# Allegro board LAY-96099_B.brd
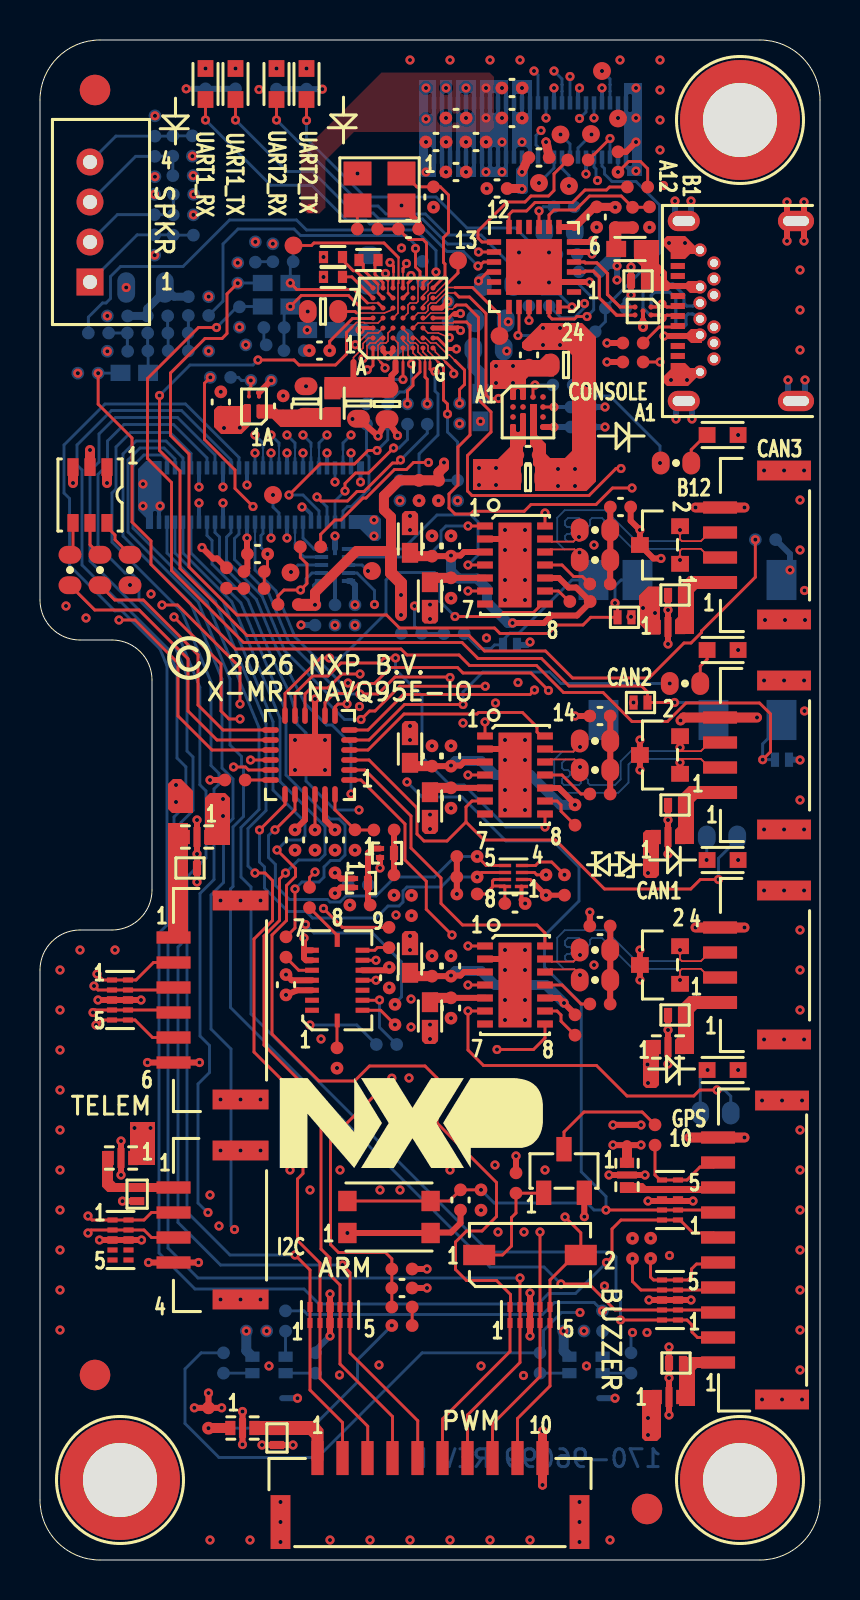
[diagram p0: board, top side]
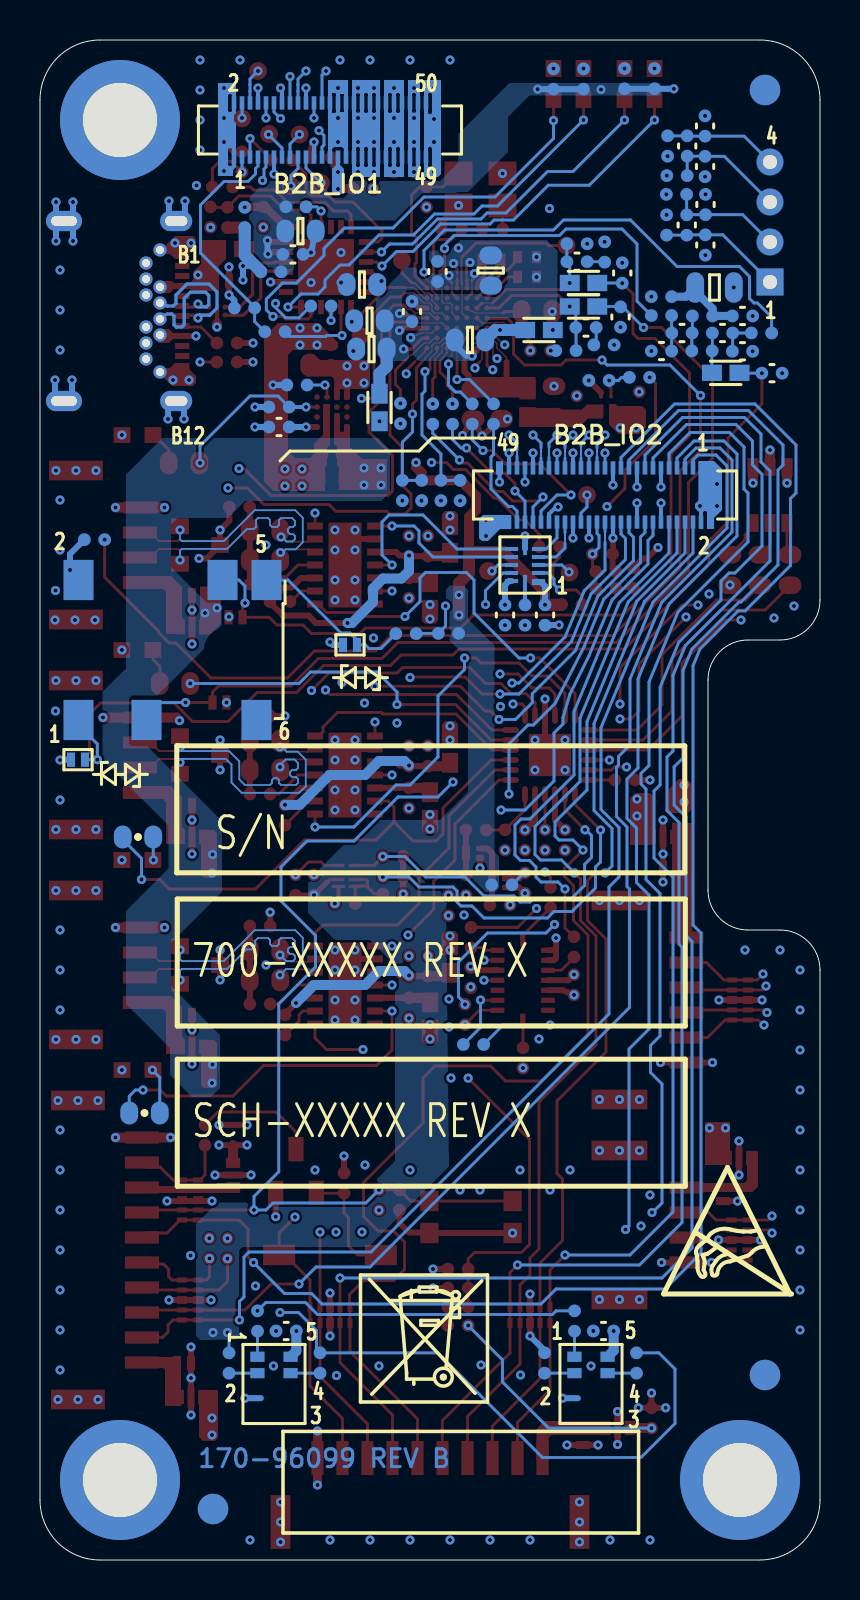
[diagram p1: board, bottom side, seen from below]

Outline 39 x 76 mm; copper layers: TOP, L2_GND1, L3_SIG1, L4_SIG2, L5_GND2, BOTTOM. Coordinates in mm from the lower left corner of the outline.
Outline path: 0,73 arc(0.88,75.12) 3,76 36,76 arc(38.12,75.12) 39,73 39,3 arc(38.12,0.88) 36,0 3,0 arc(0.88,0.88) 0,3 0,29.5 arc(0.59,30.91) 2,31.5 3.6,31.5 arc(5.01,32.09) 5.6,33.5 5.6,44 arc(5.01,45.41) 3.6,46 2,46 arc(0.59,46.59) 0,48 0,73

## Design rules (mm)
constraint set DEFAULT: min track width 0.145
net group CAN1_: nets CAN1_H CAN1_L
net group CAN2_: nets CAN2_H CAN2_L
net group CAN3_: nets CAN3_H CAN3_L
net group USB_CON_D: nets USB_CON_DM USB_CON_DP
net group USB_D: nets USB_DM USB_DP
net group CLK: nets CCM_CLKO2_FLEXIO1_IO27 CCM_CLKO3_CAN3_TX CCM_CLKO4_CAN3_RX DEBUG_TCLK_SWCLK GPIO15_SPI8_SCK SAI2_TX_BCLK
net group I2C: nets I2C4_SCL I2C4_SDA I3C1_SCL I3C1_SDA I3C2A_SCL I3C2A_SDA
net group POWER: nets CON_CAN1_5V0 CON_CAN2_5V0 CON_CAN3_5V0 N20053822 N20058873 N20059703 N20163544 N20163589 N20386625 VBUS VDD_CAN1_3V3 VDD_CAN1_5V0 VDD_CAN2_3V3 VDD_CAN2_5V0 VDD_CAN3_3V3 VDD_CAN3_5V0 VDD_CON_GPS_3V3 VDD_CON_GPS_5V0 VDD_CON_I2C_5V0 VDD_CON_PWM VDD_CON_UART_5V0

## Placement (name value [footprint] x y rotation side)
BH1  MH3.7_6  [MH236-146P]  35 72 0 top
BH2  MH3.7_6  [MH236-146P]  35 4 0 top
BH3  MH3.7_6  [MH236-146P]  4 4 0 top
C1  0.047uF  [CC0402_25]  19.6 29.7 90 top
C2  0.047uF  [CC0402_25]  20.55 27.6 270 top
C4  1uF  [CC0402_25]  20.55 29.7 90 top
C5  4700pF  [CC0402_25]  28 31.7 180 top
C6  0.047uF  [CC0402_25]  19.6 40.2 90 top
C7  0.047uF  [CC0402_25]  20.55 38.1 270 top
C9  1uF  [CC0402_25]  20.55 40.2 90 top
C10  4700pF  [CC0402_25]  28 42.2 180 top
C11  0.047uF  [CC0402_25]  19.6 50.7 90 top
C12  0.047uF  [CC0402_25]  20.55 48.6 270 top
C14  1uF  [CC0402_25]  20.55 50.7 90 top
C15  4700pF  [CC0402_25]  29.02 52.65 0 top
C16  0.1uF  [CC0402_25]  24.45 60.25 90 top
C17  1000pF  [CC0402_25]  27.05 56.65 0 bottom
C18  0.1uF  [CC0402_25]  17.46 29.11 270 top
C19  0.1uF  [CC0402_25]  12.3 28.76 90 top
C132  4.7uF  [CC0603_OV]  22.52 61.96 0 bottom
C133  4.7uF  [CC0603_OV]  16.46 64.47 90 bottom
C134  0.1uF  [CC0402_25]  20.4 62.42 90 bottom
C135  4.7uF  [CC0603_OV]  22.43 60.55 0 bottom
C136  4.7uF  [CC0603_OV]  17.5 61 0 bottom
C138  4.7uF  [CC0603_OV]  17.35 57.8 270 top
C139  0.1uF  [CC0402_25]  12.15 64.91 180 bottom
C140  220pF  [CC0402_25]  9.89 64.35 90 bottom
C141  4.7uF  [CC0603_OV]  15.92 57.83 270 top
C142  0.1uF  [CC0402_25]  11.7 61.62 180 bottom
C143  220pF  [CC0402_25]  9.97 62.15 270 bottom
C144  1uF  [CC0402_25]  6.9 61.35 180 bottom
C145  1uF  [CC0402_25]  4.88 61.35 0 bottom
C146  2.2uF  [CC0402_TOL0P2]  16.43 65 0 top
C147  2.2uF  [CC0402_TOL0P2]  14.65 65.15 180 top
C148  2.2uF  [CC0402_TOL0P2]  14.65 64.16 180 top
C149  4.7uF  [CC0603_OV]  14.15 62.42 180 top
C150  1uF  [CC0402_25]  13.97 60.47 180 top
C151  15pF  [CC0402_25]  5.73 65.75 270 bottom
C152  1uF  [CC0402_25]  9.04 57.9 90 top
C153  0.1uF  [CC0402_25]  12.16 57.7 90 top
C154  4.7uF  [CC0603_OV]  13.3 57.92 90 top
C155  15pF  [CC0402_25]  6.66 66.75 90 bottom
C156  15pF  [CC0402_25]  5.72 67.78 270 bottom
C157  15pF  [CC0402_25]  5.75 69.67 270 bottom
C158  15pF  [CC0402_25]  6.64 70.7 90 bottom
C159  15pF  [CC0402_25]  5.75 71.7 270 bottom
C500  0.1uF  [CC0402_25]  19.12 64.42 90 bottom
C514  0.1uF  [CC0402_25]  12.75 36 270 top
C515  0.1uF  [CC0402_25]  14.75 36 270 top
C523  10uF  [CC0603_OV]  24.4 54.1 0 top
C524  0.1uF  [CC0402_25]  24.4 55.25 0 top
C526  10uF  [CC0603_OV]  26.3 59.75 0 top
C527  0.1uF  [CC0402_25]  19.8 70.9 180 top
C528  0.1uF  [CC0402_25]  23.6 72.1 0 top
C531  1uF  [CC0402_25]  20.8 69.4 0 top
C532  1uF  [CC0402_25]  21.8 70.9 180 top
C533  0.1uF  [CC0402_25]  20.8 72.1 0 top
C534  0.1uF  [CC0402_25]  23.6 73.6 0 top
C535  0.1uF  [CC0402_25]  15.75 47.25 270 bottom
C536  0.1uF  [CC0402_25]  13.75 47.25 270 bottom
C537  0.1uF  [CC0402_25]  18.1 13.6 0 top
C538  0.1uF  [CC0402_25]  10.88 50.3 180 top
C544  0.1uF  [CC0402_25]  26.35 65.28 180 bottom
C545  4.7uF  [CC0603_OV]  22.9 63.77 0 bottom
C546  4.7uF  [CC0603_OV]  25.98 66.44 180 bottom
C547  1uF  [CC0402_25]  27.83 67.15 270 top
C588  15pF  [CC0402_25]  7.92 60.45 0 bottom
C589  15pF  [CC0402_25]  3.88 60.44 0 bottom
C590  15pF  [CC0402_25]  2.4 59.34 180 bottom
C591  1uF  [CC0402_25]  3.88 62.2 180 bottom
C592  22uF  [CC0805_OV]  5.28 63.62 180 bottom
C593  10pF  [CC0402_25]  19.68 68.15 270 top
C594  10pF  [CC0402_25]  18.43 66.55 0 top
C595  0.1uF  [CC0402_25]  23.75 32.83 0 top
C597  0.1uF  [CC0402_25]  10.82 11.45 0 bottom
C598  0.1uF  [CC0402_25]  26.69 11.45 0 bottom
C599  1uF  [CC0402_25]  24.95 70.12 0 top
C600  0.1uF  [CC0402_25]  22.85 68.58 180 top
C601  0.1uF  [CC0402_25]  21.02 18 90 top
D1  PESD5V0F1BL  [SOD882]  29.9 63.95 0 top
D2  LED_ORANGE  [LED_0603_11MIL]  8.28 73.8 270 top
D3  LED_GRN  [LED_0603]  9.78 73.8 270 top
D4  LED_ORANGE  [LED_0603_11MIL]  11.82 73.8 270 top
D5  LED_GRN  [LED_0603]  13.32 73.8 270 top
D7  ESD7104  [UDFN10_2P5X1]  31.5 13 180 top
D10  ESD7104  [UDFN10_2P5X1]  4 28 0 top
D26  PESD5V0F1BL  [SOD882]  31.8 9.85 0 top
D27  PESD5V0F1BL  [SOD882]  7.5 34.6 180 top
D31  PESD5V0F1BL  [SOD882]  11.85 6.1 90 top
D32  PESD5V0F1BL  [SOD882]  31.75 48.25 0 top
D33  PESD5V0F1BL  [SOD882]  31.75 37.75 0 top
D34  PESD5V0F1BL  [SOD882]  31.75 27.25 0 top
D35  ESD7104  [UDFN10_2P5X1]  14.5 12.25 90 top
D36  ESD7104  [UDFN10_2P5X1]  24.5 12.25 90 top
D37  ESD7104  [UDFN10_2P5X1]  31.5 18 180 top
D38  ESD7104  [UDFN10_2P5X1]  4.03 16 0 top
D39  LED_SUPER_RED  [LED_0603]  34.13 56.25 0 top
D41  LED_GRN  [LED_0603]  34.13 35 0 top
D42  LED_GRN  [LED_0603]  34.13 45.5 0 top
D43  LED_GRN  [LED_0603]  34.13 24.5 0 top
D44  PESD5V0F1BL  [SOD882]  4.86 18.29 90 top
D45  PESD5V0F1BL  [SOD882]  37.1 40.02 180 bottom
D46  PESD5V0F1BL  [SOD882]  29.23 47.14 180 top
D47  PESD5V0F1BL  [SOD882]  23.5 45.75 180 bottom
D48  PESD5V0F1BL  [SOD882]  30.02 42.87 0 top
FL4  0.1uF  [CC_FIL_0402]  10.12 6.6 0 top
FL5  0.1uF  [CC_FIL_0402]  31.45 8.15 0 top
FL6  0.1uF  [CC_FIL_0402]  29.35 19.25 270 top
FL7  0.1uF  [CC_FIL_0402]  7.85 36.15 180 top
FL8  0.1uF  [CC_FIL_0402]  4.05 20.1 180 top
FL9  0.1uF  [CC_FIL_0402]  31.4 46.65 0 top
FL10  0.1uF  [CC_FIL_0402]  31.4 36.15 0 top
FL11  0.1uF  [CC_FIL_0402]  31.4 25.65 0 top
J1  CON 2X25  [CON_RCPT_2X25_0P4MM_SM]  24.5 71.5 180 bottom
J2  CON 2X25  [CON_RCPT_2X25_0P4MM_SM]  10.75 53.25 0 bottom
J4  CON_1X4  [CON_1X4_1P25_8P25X4P25_SM_RA]  36.25 29.75 90 top
J8  CON_1X4  [CON_1X4_1P25_8P25X4P25_SM_RA]  36.25 40.25 90 top
J9  CON_1X4  [CON_1X4_1P25_8P25X4P25_SM_RA]  36.25 50.75 90 top
J10  23K2 0101#LCP-872-2LF-L22-S22  [CON24_USB_TYPEC_RA_SMT_TH_2P2L]  33 65.5 90 top
J12  CON 1X10 SM  [CON10_1P25_15P75X4P05_SM]  19.5 3.25 0 top
J13  CON_1X4  [CON_1X4_1P25_8P25X4P25_SM]  9 16.75 90 top
J14  CON_1X6  [CON_1X6_1P25_10P75X4P25_SM]  9 28 90 top
J22  CON 1X10 SM  [CON10_1P25_15P75X4P05_SM]  35.75 15.5 90 top
J24  CON 1X4 PLUG  [CON_PH_4M_2MM_TH]  2.5 63.9 90 top
J25  CONN AUDIO 6  [CON6P_JACK_SMT]  34.17 45.5 180 bottom
L1  BLM18KG121TZ1  [IND_0603]  18.5 30.05 270 top
L2  BLM18KG121TZ1  [IND_0603]  19.5 27.2 90 top
L3  BLM18KG121TZ1  [IND_0603]  18.5 40.55 270 top
L4  BLM18KG121TZ1  [IND_0603]  19.5 37.7 90 top
L5  BLM18KG121TZ1  [IND_0603]  18.5 51.05 270 top
L6  BLM18KG121TZ1  [IND_0603]  19.5 48.2 90 top
L7  120OHM@100MHZ  [IND_0603]  14.63 57.84 90 top
L8  120OHM@100MHZ  [IND_0603]  11.82 63.85 180 bottom
L9  120OHM@100MHZ  [IND_0603]  11.82 62.67 180 bottom
L41  120OHM@100MHZ  [IND_0603]  4.72 59.36 180 bottom
L53  120OHM@100MHZ  [IND_0603]  29.5 65.55 180 top
L54  120OHM@100MHZ  [IND_0603]  22.02 57.62 90 bottom
L55  120OHM@100MHZ  [IND_0603]  14.05 61.5 0 bottom
NOREF  -  []  22.2 36.95 0 top
NOREF#2  -  []  10.07 7 0 top
NOREF#3  -  []  24.01 45.44 90 top
NOREF#4  -  []  31.45 9.85 0 top
NOREF#5  -  []  46.6 46.6 90 top
NOREF#6  -  []  6.86 4.9 0 top
NOREF#7  -  []  30.79 46.65 0 top
NOREF#8  -  []  31.4 37.75 0 top
NOREF#9  -  []  17 35.12 90 top
NOREF#10  -  []  10.25 58.37 0 top
NOREF#11  -  []  34 40.88 90 top
NOREF#12  -  []  22.2 26.45 0 top
NOREF#13  -  []  19.7 70.14 0 top
NOREF#14  -  []  19.53 16.35 90 top
NOREF#15  -  []  23.65 56.65 0 top
NOREF#16  -  []  37.2 26.02 90 top
NOREF#17  -  []  14.07 50.55 0 top
NOREF#18  -  []  10.07 7 90 top
NOREF#19  -  []  14.86 26.98 90 top
NOREF#20  -  []  38.1 59.83 90 top
NOREF#21  -  []  36.75 40.02 0 top
NOREF#22  -  []  13.6 30.49 0 top
NOREF#23  -  []  37.8 57.95 90 top
NOREF#24  -  []  29.73 46.83 90 top
NOREF#25  -  []  25.3 47.45 90 top
NOREF#26  -  []  11.45 8.09 90 top
NOREF#27  -  []  21.96 15.25 0 top
NOREF#28  -  []  9.52 6.6 0 top
NOREF#29  -  [unnamed#2]  30.35 2.55 0 top
NOREF#30  -  []  30.13 7.79 0 top
NOREF#31  -  []  5.47 54.6 0 top
NOREF#32  -  []  28.5 70.14 0 top
NOREF#33  -  []  30.15 62.45 90 top
NOREF#34  -  []  23.25 33.67 0 top
NOREF#35  -  []  28.32 48.75 0 top
NOREF#36  -  []  22.25 37.3 0 top
NOREF#37  -  []  34.54 0 90 top
NOREF#38  -  []  8.46 36.51 0 top
NOREF#39  -  []  41.6 57.35 0 top
NOREF#40  -  []  15.43 48.95 90 top
NOREF#41  -  []  38.3 25.6 0 top
NOREF#42  -  []  22.99 45.44 0 top
NOREF#43  -  []  15.53 33.52 0 top
NOREF#44  -  []  9.07 1.35 0 top
NOREF#45  -  []  23.65 56.65 0 top
NOREF#46  -  []  23.15 45.75 0 top
NOREF#47  -  []  46.6 25.6 90 top
NOREF#48  -  []  30.79 46.29 0 top
NOREF#49  -  []  30.84 8.15 0 top
NOREF#50  -  []  33.7 60.05 90 top
NOREF#51  -  []  12.25 42.23 0 top
NOREF#52  -  []  34 52.62 90 top
NOREF#53  -  []  -494.52 -243.34 0 top
NOREF#54  -  []  37.2 36.52 90 top
NOREF#55  -  []  23.29 56.28 0 top
NOREF#56  -  []  25.3 36.95 90 top
NOREF#57  -  []  27.3 8.09 90 top
NOREF#58  -  []  2.5 63.9 90 top
NOREF#59  -  []  11.15 12.6 0 top
NOREF#60  -  []  16.82 35.02 0 top
NOREF#61  -  []  37.86 4.9 0 top
NOREF#62  -  []  34 38.38 0 top
NOREF#63  -  []  2.5 69.9 90 top
NOREF#64  -  []  31.89 59.7 90 top
NOREF#65  -  []  16.02 51.9 90 top
NOREF#66  -  []  30.62 26.54 90 top
NOREF#67  -  []  21.95 22.6 90 top
NOREF#68  -  []  6.68 24.88 0 top
NOREF#69  -  []  0 70.31 0 top
NOREF#70  -  []  11.85 5.75 90 top
NOREF#71  -  []  39.33 42.25 90 top
NOREF#72  -  []  25.25 39.25 90 top
NOREF#73  -  []  15.53 33.52 90 top
NOREF#74  -  []  1.65 51.85 90 top
NOREF#75  -  []  4.35 50.17 0 top
NOREF#76  -  []  22.25 26.8 0 top
NOREF#77  -  []  6.35 54.6 0 top
NOREF#78  -  []  30.9 70.47 0 top
NOREF#79  -  []  3.24 2.25 0 top
NOREF#80  -  []  17.15 50.17 90 top
NOREF#81  -  []  7.24 36.15 0 top
NOREF#82  -  []  37.2 47.02 90 top
NOREF#83  -  []  33.9 9.88 90 top
NOREF#84  -  []  34 31.62 90 top
NOREF#85  -  []  38.3 46.6 0 top
NOREF#86  -  []  16.41 31.29 90 top
NOREF#87  -  []  38.15 7.62 0 top
NOREF#88  -  []  29.88 49 0 top
NOREF#89  -  []  22.2 47.45 0 top
NOREF#90  -  []  14.25 42.23 0 top
NOREF#91  -  []  19.45 12.6 90 top
NOREF#92  -  []  5.17 17.78 90 top
NOREF#93  -  []  9.52 6.24 0 top
NOREF#94  -  []  16.82 35.02 90 top
NOREF#95  -  []  30.62 37.04 90 top
NOREF#96  -  []  29.54 62.86 0 top
NOREF#97  -  []  22.25 47.8 0 top
NOREF#98  -  []  15.7 33.62 90 top
NOREF#99  -  []  38.3 36.1 0 top
NOREF#100  -  []  30.79 25.29 0 top
NOREF#101  -  []  26.47 9.34 90 top
NOREF#102  -  []  11.62 -14.9 90 top
NOREF#103  -  []  10.62 9.34 90 top
NOREF#104  -  []  29.55 63.95 0 top
NOREF#105  -  []  30.79 25.65 0 top
NOREF#106  -  []  15.95 65 0 top
NOREF#107  -  [unnamed#2]  2.75 73.5 0 top
NOREF#108  -  []  21.65 16.65 0 top
NOREF#109  -  []  51.8 57.35 90 top
NOREF#110  -  []  28.71 47.45 0 top
NOREF#111  -  []  34 48.88 90 top
NOREF#112  -  []  10.03 13.03 90 top
NOREF#113  -  []  6.68 31.12 90 top
NOREF#114  -  []  10.25 56.98 90 top
NOREF#115  -  []  1.08 51.62 0 top
NOREF#116  -  []  11.15 22.6 0 top
NOREF#117  -  []  4.55 17.78 0 top
NOREF#118  -  []  27.68 49 0 top
NOREF#119  -  []  33.7 64.05 90 top
NOREF#120  -  []  29.52 42.56 0 top
NOREF#121  -  []  46.6 36.1 90 top
NOREF#122  -  []  10.62 9.34 0 top
NOREF#123  -  []  33.7 58.73 90 top
NOREF#124  -  []  33.7 58.73 90 top
NOREF#125  -  []  15.82 64.65 0 top
NOREF#126  -  []  6.68 14.88 0 top
NOREF#127  -  []  13.6 27.49 90 top
NOREF#128  -  []  6.68 24.88 90 top
NOREF#129  -  []  13.6 30.49 0 top
NOREF#130  -  []  -72.88 -48.4 0 top
NOREF#131  -  []  25.25 49.75 90 top
NOREF#132  -  []  27.35 13.85 90 top
NOREF#133  -  []  30.62 38.06 0 top
NOREF#134  -  []  37.1 8.03 90 top
NOREF#135  -  []  33 59.4 90 top
NOREF#136  -  []  15.65 48.7 90 top
NOREF#137  -  []  19.43 15.62 90 top
NOREF#138  -  []  12.03 1.9 0 top
NOREF#139  -  []  10.45 57.17 90 top
NOREF#140  -  []  29.54 62.86 90 top
NOREF#141  -  []  31.91 10.16 90 top
NOREF#142  -  []  30.79 46.65 0 top
NOREF#143  -  []  25.25 28.75 90 top
NOREF#144  -  []  25.3 26.45 90 top
NOREF#145  -  []  5.95 54.6 0 top
NOREF#146  -  []  31.89 64.7 90 top
NOREF#147  -  []  7.15 34.6 0 top
NOREF#148  -  []  15.7 33.62 0 top
NOREF#149  -  []  14.18 65.15 0 top
NOREF#150  -  []  29.35 18.64 90 top
NOREF#151  -  []  34 42.12 90 top
NOREF#152  -  []  25.15 56.65 90 top
NOREF#153  -  []  23.18 33.52 90 top
NOREF#154  -  []  3.44 20.1 0 top
NOREF#155  -  []  1.65 51.85 0 top
NOREF#156  -  []  14.18 64.16 0 top
NOREF#157  -  []  29.68 42.87 0 top
NOREF#158  -  []  17 35.12 0 top
NOREF#159  -  []  14.05 64.51 0 top
NOREF#160  -  []  26.47 9.34 0 top
NOREF#161  -  []  15.55 42.3 90 top
NOREF#162  -  []  5.3 61.95 90 top
NOREF#163  -  []  15.37 17.95 0 top
NOREF#164  -  []  19.23 70.14 0 top
NOREF#165  -  []  43.7 70.47 90 top
NOREF#166  -  []  14.05 63.81 90 top
NOREF#167  -  []  30.79 25.65 0 top
NOREF#168  -  []  30.79 36.15 0 top
NOREF#169  -  []  34 51.38 90 top
NOREF#170  -  []  37.86 72.9 0 top
NOREF#171  -  []  0.8 71.85 0 top
NOREF#172  -  []  29.52 42.56 90 top
NOREF#173  -  []  7.85 36.15 0 top
NOREF#174  -  []  29.35 19.25 90 top
NOREF#175  -  []  31.29 10.16 0 top
NOREF#176  -  []  32.19 57.95 0 top
NOREF#177  -  []  17.02 64.65 90 top
NOREF#178  -  []  10.03 23.02 90 top
NOREF#179  -  []  14.75 38.27 90 top
NOREF#180  -  []  12 19.6 0 top
NOREF#181  -  []  28.88 47.14 0 top
NOREF#182  -  [unnamed#2]  2.75 9.25 0 top
NOREF#183  -  []  34 48.88 0 top
NOREF#184  -  []  34 38.38 90 top
NOREF#185  -  []  33.7 58.73 90 top
NOREF#186  -  []  4.66 19.74 90 top
NOREF#187  -  []  38.15 7.62 90 top
NOREF#188  -  []  11.62 0.85 0 top
NOREF#189  -  []  7.39 33.27 90 top
NOREF#190  -  []  10.45 58.17 0 top
NOREF#191  -  []  11.54 5.59 90 top
NOREF#192  -  []  25.25 47.8 90 top
NOREF#193  -  []  23.25 34.38 90 top
NOREF#194  -  []  4.86 17.94 90 top
NOREF#195  -  []  23.18 34.88 0 top
NOREF#196  -  []  30.79 35.79 0 top
NOREF#197  -  []  37.61 39.71 90 top
NOREF#198  -  []  31.4 48.25 0 top
NOREF#199  -  []  9.52 6.6 0 top
NOREF#200  -  []  15.47 18.68 0 top
NOREF#201  -  []  10.52 6.21 0 top
NOREF#202  -  []  28.99 19.86 90 top
NOREF#203  -  []  13.88 5.1 0 top
NOREF#204  -  []  29.75 62.25 90 top
NOREF#205  -  []  19.23 70.14 90 top
NOREF#206  -  []  34 30.38 90 top
NOREF#207  -  []  36.59 39.71 0 top
NOREF#208  -  []  6.68 18.62 90 top
NOREF#209  -  []  30.84 8.15 0 top
NOREF#210  -  []  25.25 26.8 90 top
NOREF#211  -  []  14.05 64.8 90 top
NOREF#212  -  []  14.05 65.5 0 top
NOREF#213  -  []  25.93 7 0 top
NOREF#214  -  []  31.4 27.25 0 top
NOREF#215  -  []  23.25 34.73 0 top
NOREF#216  -  []  30.62 48.56 0 top
NOREF#217  -  []  30.79 36.15 0 top
NOREF#218  -  []  25.52 56.28 90 top
NOREF#219  -  []  6.68 14.88 90 top
NOREF#220  -  []  6.68 17.38 90 top
NOREF#221  -  []  7.45 45.08 0 top
NOREF#222  -  []  13.85 50.8 0 top
NOREF#223  -  []  15.43 48.95 90 top
NOREF#224  -  []  1.08 51.62 90 top
NOREF#225  -  []  6.68 29.88 90 top
NOREF#226  -  []  29.39 63.64 90 top
NOREF#227  -  []  27.02 48.75 0 top
NOREF#228  -  []  34 27.88 90 top
NOREF#229  -  []  29.39 63.64 0 top
NOREF#230  -  []  30.62 27.56 0 top
NOREF#231  -  []  25.25 37.3 90 top
NOREF#232  -  []  15.55 38.2 0 top
NOREF#233  -  []  4.05 20.1 0 top
NOREF#234  -  []  30.62 47.54 90 top
NOREF#235  -  []  11.81 33.99 90 top
NOREF#236  -  []  25.15 56.65 90 top
NOREF#237  -  []  7.39 34.29 0 top
NOREF#238  -  []  34 27.88 0 top
NOREF#239  -  []  25.93 7 90 top
NOREF#240  -  [unnamed#2]  2.75 73.5 180 bottom
NOREF#241  -  []  26.85 1.35 180 bottom
NOREF#242  -  [unnamed#2]  2.75 9.25 180 bottom
NOREF#243  -  []  32.14 26.7 180 bottom
NOREF#244  -  []  32.45 46.7 180 bottom
NOREF#245  -  [unnamed#2]  30.35 2.55 180 bottom
NOREF#246  -  []  32.16 34.36 180 bottom
NOREF#247  -  []  32.14 18.69 180 bottom
NOREF#248  -  []  22.98 7.9 180 bottom
Q1  BSH103  [SOT23]  26.2 19.45 0 top
Q3  NX5008NBKMYL  [DFN10106B]  16.05 33.85 0 top
Q4  NX5008NBKMYL  [DFN10106B]  17.35 35.35 0 top
R1  10K  [RC0402_25]  26.75 26.75 270 top
R3  60.4  [RC0603_OV]  27.75 30.5 0 top
R4  60.4  [RC0603_OV]  27.75 29 0 top
R5  0 OHM  [RC0402_25]  28 27.8 0 top
R6  10K  [RC0402_25]  26.75 37.25 270 top
R7  60.4  [RC0603_OV]  27.75 39.5 0 top
R8  0 OHM  [RC0402_25]  28 38.3 0 top
R9  60.4  [RC0603_OV]  27.75 40.95 0 top
R10  10K  [RC0402_25]  27 47.92 180 top
R11  60.4  [RC0603_OV]  27.75 50 0 top
R12  0 OHM  [RC0402_25]  28 48.8 0 top
R13  60.4  [RC0603_OV]  27.75 51.5 0 top
R14  10K  [RC0402_25]  27.05 57.65 0 bottom
R21  5.1K  [RC0402_25]  29.65 60.85 180 top
R22  5.1K  [RC0402_25]  29.65 59.9 180 top
R30  1.00k  [RC0402_25]  8.28 74.07 90 bottom
R31  1.00k  [RC0402_25]  9.78 74.07 90 bottom
R32  1.00k  [RC0402_25]  11.82 74.05 90 bottom
R33  1.00k  [RC0402_25]  13.32 74.05 90 bottom
R34  0 OHM  [RC0402_25]  9.75 39 180 top
R35  10K  [RC0402_25]  13.75 36 90 top
R36  10K  [RC0402_25]  15.75 36 90 top
R40  0 OHM  [RC0402_25]  30.75 21.25 270 top
R41  10K  [RC0402_25]  23.8 18.85 90 top
R43  51K  [RC0402_25]  26.15 58.75 0 bottom
R45  10K  [RC0402_25]  14.75 33.85 270 top
R46  10K  [RC0402_25]  17.7 33.75 90 top
R47  10K  [RC0402_25]  16 32.75 0 top
R48  0 OHM  [RC0402_25]  17.2 36.5 180 top
R49  390  [RC0603_OV]  31.8 54.85 0 top
R50  0 OHM  [RC0402_25]  8.43 7.1 270 top
R51  0 OHM  [RC0402_25]  18.1 11.72 180 top
R52  390  [RC0603_OV]  34.1 36.15 180 bottom
R53  390  [RC0603_OV]  32.25 43.83 0 top
R54  390  [RC0603_OV]  33.77 22.35 180 bottom
R55  10K  [RC0402_25]  14.75 47.25 270 bottom
R56  1K  [RC0402_25]  18.1 14.55 0 top
R57  6.98K  [RC0402_25]  18.1 12.65 180 top
R58  0 OHM  [RC0402_25]  26.9 70 0 top
R59  0 OHM  [RC0402_25]  29.88 68.65 0 top
R60  0 OHM  [RC0402_25]  24.95 62.7 0 bottom
R61  0 OHM  [RC0402_25]  27.25 61.41 0 bottom
R62  1.5K  [RC0603_OV]  4.5 49.5 90 top
R63  1.5K  [RC0603_OV]  3 49.5 90 top
R64  1.5K  [RC0603_OV]  1.5 49.5 90 top
R65  0 OHM  [RC0402_25]  9.32 49.1 270 top
R91  1K  [RC0402_25]  10.7 48.58 0 top
R94  1K  [RC0402_25]  10.71 49.42 180 top
R111  2.2K  [RC0402_25]  29.62 15.57 270 top
R112  2.2K  [RC0402_25]  30.53 15.58 270 top
R113  0 OHM  [RC0402_25]  15.91 33.76 180 bottom
R114  47K  [RC0402_25]  30.47 67.15 270 top
R115  4.7K  [RC0402_25]  26.2 67.66 180 bottom
R116  24K  [RC0402_25]  29.63 67.13 90 top
R117  0 OHM  [RC0402_25]  28.76 67.13 90 top
R118  0 OHM  [RC0402_25]  28.76 67.13 90 bottom
R119  0 OHM  [RC0402_25]  27.45 64.41 180 bottom
R323  100K  [RC0402_25]  18.57 46.33 0 bottom
R324  0 OHM  [RC0402_25]  20.7 46.32 0 bottom
R325  10K  [RC0402_25]  12.15 65.81 180 bottom
R326  20  [RC0402_25]  10.77 65.4 90 bottom
R327  20  [RC0402_25]  10.8 60.76 180 bottom
R328  10K  [RC0402_25]  12.71 60.47 0 bottom
R329  0 OHM  [RC0402_25]  36.27 51.02 180 bottom
R331  10K  [RC0402_25]  12.41 47.77 180 top
R332  0 OHM  [RC0402_25]  18.95 53.48 90 bottom
R333  0 OHM  [RC0402_25]  19.92 53.48 90 bottom
R334  0 OHM  [RC0402_25]  20.98 57.33 90 bottom
R335  0 OHM  [RC0402_25]  13.53 50.66 180 top
R336  0 OHM  [RC0402_25]  18.37 57.3 90 bottom
R337  0 OHM  [RC0402_25]  19.36 57.3 90 bottom
R338  0 OHM  [RC0402_25]  16.32 57.3 90 bottom
R339  0 OHM  [RC0402_25]  17.39 57.3 90 bottom
R341  0 OHM  [RC0402_25]  7.67 66.75 270 bottom
R342  4.7K  [RC0402_25]  11.05 58.98 0 bottom
R343  0 OHM  [RC0402_25]  7.17 68.28 180 bottom
R344  0 OHM  [RC0402_25]  9.03 59.13 0 bottom
R345  0 OHM  [RC0402_25]  7.15 69.22 180 bottom
R346  0 OHM  [RC0402_25]  7.62 70.7 90 bottom
R1231  1.00k  [RC0402_25]  5.88 62.2 0 bottom
R1232  1.00k  [RC0402_25]  5.9 60.46 180 bottom
R1233  0 OHM  [RC0402_25]  7.92 63.17 180 bottom
R1234  0 OHM  [RC0402_25]  18 53.48 90 bottom
R1235  0 OHM  [RC0402_25]  20.88 53.48 90 bottom
R1236  0 OHM  [RC0402_25]  16.38 66.55 0 top
R1237  200K  [RC0402_25]  21.35 33.3 0 top
R1238  2.2K  [RC0402_25]  25.3 33.75 90 top
R1239  2.2K  [RC0402_25]  26.23 33.75 90 top
R1240  10K  [RC0402_25]  21.35 35.17 0 top
R1241  10K  [RC0402_25]  21.35 34.15 0 top
R1242  10K  [RC0402_25]  19.93 53.48 270 top
R1243  10K  [RC0402_25]  18.95 53.48 270 top
R1244  0 OHM  [RC0402_25]  7.92 62.23 180 bottom
R1245  0 OHM  [RC0402_25]  2.92 61.35 0 bottom
R1246  0 OHM  [RC0402_25]  17.75 27.27 90 top
R1247  0 OHM  [RC0402_25]  14.85 25.1 270 top
R1248  0 OHM  [RC0402_25]  18.57 32.73 90 top
R1249  0 OHM  [RC0402_25]  13.47 33.12 270 top
R1250  0 OHM  [RC0402_25]  17.45 31.12 270 top
R1251  0 OHM  [RC0402_25]  17.32 25.77 0 bottom
R1252  0 OHM  [RC0402_25]  12.3 30.65 270 top
R1253  0 OHM  [RC0402_25]  13.78 9.85 90 bottom
R1254  0 OHM  [RC0402_25]  12.28 11.95 90 bottom
R1255  0 OHM  [RC0402_25]  9.18 9.85 90 bottom
R1256  0 OHM  [RC0402_25]  28.12 11.95 90 bottom
R1257  0 OHM  [RC0402_25]  25 9.85 90 bottom
R1258  0 OHM  [RC0402_25]  29.55 9.85 270 bottom
R1259  100K  [RC0402_25]  28.77 62.6 0 bottom
R1260  100K  [RC0402_25]  28.9 69.9 90 top
R1264  10K  [RC0402_25]  22.05 18 270 top
S1  CHS-01TA1  [SW_2P8X5P7_SM]  24.5 15.25 90 top
SW3  TL6330AF200Q  [SW4_SPST_4P6X2P8_SM]  17.45 17.15 0 top
TP245  TP_35MIL  [TESTPOINT_35MIL]  12.53 49.38 270 top
TP255  TP_35MIL  [TESTPOINT_35MIL]  16.6 49.45 270 top
TP256  TP_35MIL  [TESTPOINT_35MIL]  28.9 72.08 90 top
TP257  TP_35MIL  [TESTPOINT_35MIL]  28.1 74.45 90 top
TP260  TP_35MIL  [TESTPOINT_35MIL]  24.95 68.85 90 top
TP261  TP_35MIL  [TESTPOINT_35MIL]  26.45 68.7 90 top
TP262  TP_35MIL  [TESTPOINT_35MIL]  26.02 71.28 90 top
TP263  TP_35MIL  [TESTPOINT_35MIL]  27.55 71.3 90 top
TP264  TP_35MIL  [TESTPOINT_35MIL]  11.65 53.25 90 top
TP265  TP_35MIL  [TESTPOINT_35MIL]  12.68 65.72 90 top
TP266  TP_35MIL  [TESTPOINT_35MIL]  20.9 64.97 90 top
TP267  TP_35MIL  [TESTPOINT_35MIL]  22.98 61.2 90 top
U1  PCA9306JK  [X2SON8_0P35_1X1P35MM]  23.68 34.2 180 top
U3  TJA1463ATK  [HVSON14_0P65_4P6X3P1_EP]  23.75 28.75 0 top
U6  PESD2CANFD24L-TR  [SOT23_A]  31 29.75 90 top
U11  NX5P3363UKZ  [BGA16_0P5_2P23X2P23]  24.4 57.4 0 top
U12  TJA1463ATK  [HVSON14_0P65_4P6X3P1_EP]  23.75 39.25 0 top
U13  PESD2CANFD24L-TR  [SOT23_A]  31 40.25 90 top
U14  TJA1463ATK  [HVSON14_0P65_4P6X3P1_EP]  23.75 49.75 0 top
U15  PESD2CANFD24L-TR  [SOT23_A]  31 50.75 90 top
U17  BMI088  [LGA16_0P5_3X4P5MM]  14.86 28.99 180 top
U20  PCMF1USB3S  [WLCSP5_0P4_0P82X1P22]  30.15 62.45 270 top
U21  PCAL6416AHF  [QFN24_4X4_EP2P1MM]  13.5 40.25 90 top
U22  74AVC4T3144GU12-QX  [XQFN12_0P4_1P8X2P1]  14.75 49.75 0 bottom
U23  150352M173300  [LED6_0P85_3P25X2P85_SM]  2.5 53.25 270 top
U24  CP2105  [QFN24_0P5_4X4_EP]  24.7 64.65 180 top
U31  WM8962BECSN/R  [BGA49_0P5_3P62X4]  18.15 62.1 90 top
U32  NX5P2924DUK  [WLCSP6_0P5_0P89X1P39]  10.7 57.67 180 top
U33  MMICT3902-00-012  [MIC5_3P6X2P75MM]  11.45 8.8 180 bottom
U34  MMICT3902-00-012  [MIC5_3P6X2P75MM]  27.3 8.8 180 bottom
Y1  24MHZ  [XTLOSC4_3P2X2P5MM_SM]  16.98 68.53 180 top

## Library data of the parts
BH1-BH3 = MOUNT_HOLE
C1 C2 C4-C7 C9-C12 C14-C19 C132-C136 C138-C148 C150-C159 C500 C514 C515 C523 C524 C526-C528 C531-C538 C544-C547 C588-C595 C597-C601 = CAP_NP
C149 = CAP_NP: tolerance: 10%
D1 D26 D27 D31-D34 D44-D48 = DIODE_BIDIR
D2-D5 D39 D41-D43 = LED
D7 D10 D35-D38 = ESD7104M
FL4-FL11 = EMIFILTER_NFM21P
J1 J2 = HDR_2X25_4S
J4 J8 J9 J13 = CONN_1x4_SHLD
J10 = USB24_TYPEC_SH4
J12 J22 = CON_HDR_1X10_2SH
J14 = CONN_1x6_SHLD
J24 = CONN_HDR_4X1
J25 = CON6P_JACK
L1-L6 = IND_FERRITE
L7-L9 L41 L53-L55 = BEAD_0
Q1 = MOSFET_N
Q3 Q4 = NMOS_2N7002BKW_3P
R1 R3-R14 R21 R22 R30-R36 R40 R41 R43 R45-R65 R91 R94 R111-R119 R323-R329 R331-R339 R341-R346 R1231-R1260 R1264 = RES
S1 = SW-SPST
SW3 = SW_PB_ESW
TP245 TP255-TP257 TP260-TP267 = T POINT R: Tolerance: TOLERANCE; User Part Number: 510-75618
U1 = PCA9306_TSSOP8
U3 U12 U14 = TJA1043ATK_14P_EP
U6 U13 U15 = ESD_DIODE_2LINE
U11 = NX5P3290_16P
U17 = BMI088_16P
U20 = PESD1USB30_5P_A
U21 = PCAL6416AHF_QFN24
U22 = 74AVC4T3144_12P
U23 = LED_RGB_6P
U24 = CP2105_QFN24P
U31 = WM8962_BGA_49P_A
U32 = NX5P2924DUK_WLCSP6
U33 U34 = MIC_SPH0641LM4H-1_5P
Y1 = XTAL_13

## Footprints (pads in the part's own frame, mm; a bottom-side part is the same pattern mirrored in y, then rotated)
BGA16_0P5_2P23X2P23
  round 0.28 smd: A1(-0.75,0.75) A2(-0.25,0.75) A3(0.25,0.75) A4(0.75,0.75) B1(-0.75,0.25) B2(-0.25,0.25) B3(0.25,0.25) B4(0.75,0.25) C1(-0.75,-0.25) C2(-0.25,-0.25) C3(0.25,-0.25) C4(0.75,-0.25) D1(-0.75,-0.75) D2(-0.25,-0.75) D3(0.25,-0.75) D4(0.75,-0.75)
BGA49_0P5_3P62X4
  round 0.254 smd: A1(-1.5,1.5) A2(-1,1.5) A3(-0.5,1.5) A4(0,1.5) A5(0.5,1.5) A6(1,1.5) A7(1.5,1.5) B1(-1.5,1) B2(-1,1) B3(-0.5,1) B4(0,1) B5(0.5,1) B6(1,1) B7(1.5,1) C1(-1.5,0.5) C2(-1,0.5) C3(-0.5,0.5) C4(0,0.5) C5(0.5,0.5) C6(1,0.5) C7(1.5,0.5) D1(-1.5,0) D2(-1,0) D3(-0.5,0) D4(0,0) D5(0.5,0) D6(1,0) D7(1.5,0) E1(-1.5,-0.5) E2(-1,-0.5) E3(-0.5,-0.5) E4(0,-0.5) E5(0.5,-0.5) E6(1,-0.5) E7(1.5,-0.5) F1(-1.5,-1) F2(-1,-1) F3(-0.5,-1) F4(0,-1) F5(0.5,-1) F6(1,-1) F7(1.5,-1) G1(-1.5,-1.5) G2(-1,-1.5) G3(-0.5,-1.5) G4(0,-1.5) G5(0.5,-1.5) G6(1,-1.5) G7(1.5,-1.5)
CC0402_25
  round 0.635 smd: 1(-0.508,0) 2(0.508,0)
CC0402_TOL0P2
  rect 0.457x0.61 smd: 1(-0.475,0) 2(0.475,0)
CC0603_OV
  oval 0.889x1.143 smd: 1(-0.762,0) 2(0.762,0)
CC0805_OV
  oval 0.889x1.524 smd: 1(-0.965,0) 2(0.965,0)
CC_FIL_0402
  rect 0.508x0.711 smd: 1(-0.61,0) 3(0.61,0)
  rect 0.356x0.991 smd: 2(0,0)
CON6P_JACK_SMT
  round 0 hole 1.499 unplated: (-2.5,0) (4.5,0)
  rect 1.499x2.007 smd: 1(-2.9,-3.5) 2(-2.9,3.5) 3(0.5,-3.5) 4(4.3,3.5) 5(6.5,3.5) 6(6,-3.5)
CON10_1P25_15P75X4P05_SM
  rect 0.61x1.702 smd: 1(-5.625,1.848) 2(-4.375,1.848) 3(-3.125,1.848) 4(-1.875,1.848) 5(-0.625,1.848) 6(0.625,1.848) 7(1.875,1.848) 8(3.125,1.848) 9(4.375,1.848) 10(5.625,1.848)
  rect 0.991x2.692 smd: S1(-7.475,-1.352) S2(7.475,-1.352)
CON24_USB_TYPEC_RA_SMT_TH_2P2L
  round 0 hole 0.66 unplated: (-6.775,-0.7) (0.675,-0.7)
  rect 0.305x0.711 smd: A1(-5.8,1.11) A2(-5.3,1.11) A3(-4.8,1.11) A4(-4.3,1.11) A5(-3.8,1.11) A6(-3.3,1.11) A7(-2.8,1.11) A8(-2.3,1.11) A9(-1.8,1.11) A10(-1.3,1.11) A11(-0.8,1.11) A12(-0.3,1.11)
  round 0.66 hole 0.406: B1(0,0) B2(-0.65,-0.7) B3(-1.45,-0.7) B4(-1.85,0) B5(-2.25,-0.7) B6(-2.65,0) B7(-3.45,0) B8(-3.85,-0.7) B9(-4.25,0) B10(-4.65,-0.7) B11(-5.45,-0.7) B12(-6.1,0)
  oval 1.016x1.6 hole 0.508x1.118: SH1(-7.55,0.81) SH2(1.45,0.81)
  oval 1.016x1.803 hole 0.508x1.295: SH3(-7.55,-4.8) SH4(1.45,-4.8)
CON_1X4_1P25_8P25X4P25_SM
  rect 0.61x1.702 smd: 1(1.875,2.322) 2(0.625,2.322) 3(-0.625,2.322) 4(-1.875,2.322)
  rect 0.991x2.794 smd: SH1(-3.725,-1.028) SH2(3.725,-1.028)
CON_1X4_1P25_8P25X4P25_SM_RA
  rect 0.61x1.702 smd: 1(-1.875,2.247) 2(-0.625,2.247) 3(0.625,2.247) 4(1.875,2.247)
  rect 0.991x2.692 smd: SH1(-3.725,-0.953) SH2(3.725,-0.953)
CON_1X6_1P25_10P75X4P25_SM
  rect 0.61x1.702 smd: 1(3.125,2.322) 2(1.875,2.322) 3(0.625,2.322) 4(-0.625,2.322) 5(-1.875,2.322) 6(-3.125,2.322)
  rect 0.991x2.794 smd: SH1(-4.975,-1.028) SH2(4.975,-1.028)
CON_PH_4M_2MM_TH
  rect 1.346x1.346 hole 0.711: 1(0,0)
  round 1.346 hole 0.711: 2(2,0) 3(4,0) 4(6,0)
CON_RCPT_2X25_0P4MM_SM
  rect 0.229x0.66 smd: 1(-4.8,-1.355) 2(-4.8,1.355) 3(-4.4,-1.355) 4(-4.4,1.355) 5(-4,-1.355) 6(-4,1.355) 7(-3.6,-1.355) 8(-3.6,1.355) 9(-3.2,-1.355) 10(-3.2,1.355) 11(-2.8,-1.355) 12(-2.8,1.355) 13(-2.4,-1.355) 14(-2.4,1.355) 15(-2,-1.355) 16(-2,1.355) 17(-1.6,-1.355) 18(-1.6,1.355) 19(-1.2,-1.355) 20(-1.2,1.355) 21(-0.8,-1.355) 22(-0.8,1.355) 23(-0.4,-1.355) 24(-0.4,1.355) 25(0,-1.355) 26(0,1.355) 27(0.4,-1.355) 28(0.4,1.355) 29(0.8,-1.355) 30(0.8,1.355) 31(1.2,-1.355) 32(1.2,1.355) 33(1.6,-1.355) 34(1.6,1.355) 35(2,-1.355) 36(2,1.355) 37(2.4,-1.355) 38(2.4,1.355) 39(2.8,-1.355) 40(2.8,1.355) 41(3.2,-1.355) 42(3.2,1.355) 43(3.6,-1.355) 44(3.6,1.355) 45(4,-1.355) 46(4,1.355) 47(4.4,-1.355) 48(4.4,1.355) 49(4.8,-1.355) 50(4.8,1.355)
  rect 0.356x0.66 smd: SH1(-5.275,1.355) SH2(-5.275,-1.355) SH3(5.275,-1.355) SH4(5.275,1.355)
DFN10106B
  rect 0.406x0.254 smd: 1(-0.35,0.225) 2(-0.35,-0.225)
  rect 0.406x0.711 smd: 3(0.35,0)
HVSON14_0P65_4P6X3P1_EP
  rect 0.787x0.356 smd: 1(-1.5,1.95) 2(-1.5,1.3) 3(-1.5,0.65) 4(-1.5,0) 5(-1.5,-0.65) 6(-1.5,-1.3) 7(-1.5,-1.95) 8(1.5,-1.95) 9(1.5,-1.3) 10(1.5,-0.65) 11(1.5,0) 12(1.5,0.65) 13(1.5,1.3) 14(1.5,1.95)
  rect 1.651x4.242 smd: 15(0,0)
IND_0603
  rect 0.991x0.813 smd: 1(-0.69,0) 2(0.69,0)
LED6_0P85_3P25X2P85_SM
  rect 0.889x0.559 smd: 1(-1.395,0.85) 2(1.395,0.85) 3(-1.395,0) 4(1.395,0) 5(-1.395,-0.85) 6(1.395,-0.85)
LED_0603
  rect 0.838x0.787 smd: A(-0.775,0) C(0.775,0)
LED_0603_11MIL
  rect 0.838x0.787 smd: A(-0.775,0) C(0.775,0)
LGA16_0P5_3X4P5MM
  rect 0.686x0.254 smd: 1(1.262,1.5) 2(1.262,1) 3(1.262,0.5) 4(1.262,0) 5(1.262,-0.5) 6(1.262,-1) 7(1.262,-1.5) 9(-1.262,-1.5) 10(-1.262,-1) 11(-1.262,-0.5) 12(-1.262,0) 13(-1.262,0.5) 14(-1.262,1) 15(-1.262,1.5)
  rect 0.254x0.686 smd: 8(0,-2.013) 16(0,2.013)
MH236-146P
  round 5.994 hole 3.708: 1(0,0)
MIC5_3P6X2P75MM
  round 0 hole 0.381 unplated: (0,-0.71)
  rect 0.711x0.508 smd: 1(-0.831,1.364) 2(-0.831,0.542) 4(0.831,0.542) 5(0.831,1.364)
  round 0 smd: 3(-0.66,-0.71)
QFN24_0P5_4X4_EP
  rect 0.711x0.279 smd: 1(-2,1.25) 2(-2,0.75) 3(-2,0.25) 4(-2,-0.25) 5(-2,-0.75) 6(-2,-1.25) 13(2,-1.25) 14(2,-0.75) 15(2,-0.25) 16(2,0.25) 17(2,0.75) 18(2,1.25)
  rect 0.279x0.711 smd: 7(-1.25,-2) 8(-0.75,-2) 9(-0.25,-2) 10(0.25,-2) 11(0.75,-2) 12(1.25,-2) 19(1.25,2) 20(0.75,2) 21(0.25,2) 22(-0.25,2) 23(-0.75,2) 24(-1.25,2)
  rect 2.794x2.794 smd: 25(0,0)
QFN24_4X4_EP2P1MM
  oval 0.279x0.838 smd: 1(-1.25,-1.975) 2(-0.75,-1.975) 3(-0.25,-1.975) 4(0.25,-1.975) 5(0.75,-1.975) 6(1.25,-1.975) 13(1.25,1.975) 14(0.75,1.975) 15(0.25,1.975) 16(-0.25,1.975) 17(-0.75,1.975) 18(-1.25,1.975)
  oval 0.838x0.279 smd: 7(1.975,-1.25) 8(1.975,-0.75) 9(1.975,-0.25) 10(1.975,0.25) 11(1.975,0.75) 12(1.975,1.25) 19(-1.975,1.25) 20(-1.975,0.75) 21(-1.975,0.25) 22(-1.975,-0.25) 23(-1.975,-0.75) 24(-1.975,-1.25)
  rect 2.108x2.108 smd: 25(0,0)
RC0402_25
  round 0.635 smd: 1(-0.508,0) 2(0.508,0)
RC0603_OV
  oval 0.889x1.143 smd: 1(-0.762,0) 2(0.762,0)
SOD882
  rect 0.406x0.711 smd: 1(-0.35,0) 2(0.35,0)
SOT23
  rect 0.762x1.219 smd: 1(-1.016,-1.092) 2(1.016,-1.092) 3(0,1.092)
SOT23_A
  rect 0.787x0.889 smd: 1(-0.94,-1.003) 2(0.94,-1.003) 3(0,1.003)
SW4_SPST_4P6X2P8_SM
  rect 0.914x1.016 smd: 1(-2.08,-0.8) 2(2.08,-0.8) 3(-2.08,0.8) 4(2.08,0.8)
SW_2P8X5P7_SM
  rect 1.016x1.6 smd: 1(0,2.54) 2(0,-2.54)
TESTPOINT_35MIL
  round 0.889 smd: 1(0,0)
UDFN10_2P5X1
  rect 0.508x0.254 smd: 1(-0.4,1) 2(-0.4,0.5) 4(-0.4,-0.5) 5(-0.4,-1) 6(0.4,-1) 7(0.4,-0.5) 9(0.4,0.5) 10(0.4,1)
  rect 0.508x0.381 smd: 3(-0.4,0) 8(0.4,0)
unnamed#2
  round 1.524 smd: (0,0)
WLCSP5_0P4_0P82X1P22
  round 0.254 smd: A1(-0.2,0.4) A2(0.2,0.4) B1(0,0) C1(-0.2,-0.4) C2(0.2,-0.4)
WLCSP6_0P5_0P89X1P39
  round 0.2 smd: A1(-0.25,0.5) A2(0.25,0.5) B1(-0.25,0) B2(0.25,0) C1(-0.25,-0.5) C2(0.25,-0.5)
X2SON8_0P35_1X1P35MM
  rect 0.66x0.17 smd: 1(-0.4,0.525)
  rect 0.61x0.17 smd: 2(-0.425,0.175) 3(-0.425,-0.175) 4(-0.425,-0.525) 5(0.425,-0.525) 6(0.425,-0.175) 7(0.425,0.175) 8(0.425,0.525)
XQFN12_0P4_1P8X2P1
  rect 0.66x0.305 smd: 1(-0.675,0.85)
  rect 0.66x0.203 smd: 2(-0.675,0.4) 3(-0.675,0) 4(-0.675,-0.4) 5(-0.675,-0.8) 7(0.675,-0.8) 8(0.675,-0.4) 9(0.675,0) 10(0.675,0.4) 11(0.675,0.8)
  rect 0.203x0.66 smd: 6(0,-0.825) 12(0,0.825)
XTLOSC4_3P2X2P5MM_SM
  rect 1.397x1.194 smd: 1(-1.1,-0.8) 2(1.1,-0.8) 3(1.1,0.8) 4(-1.1,0.8)

## Nets
GND: BH1.1 BH2.1 BH3.1 C1.2 C2.2 C4.2 C5.2 C6.2 C7.2 C9.2 C10.2 C11.2 C12.2 C14.2 C15.2 C16.2 C17.2 C18.2 C19.2 C132.2 C133.2 C134.2 C135.2 C136.2 C138.2 C140.2 C141.2 C143.2 C147.2 C148.2 C149.2 C150.2 C151.2 C152.2 C153.2 C154.2 C156.1 C157.2 C159.1 C500.2 C514.2 C515.2 C523.2 C524.2 C526.2 C527.2 C528.2 C531.2 C532.2 C533.2 C534.2 C535.2 C536.2 C537.2 C538.2 C544.2 C545.2 C546.2 C547.2 C588.2 C589.1 C590.2 C591.2 C592.2 C593.2 C594.2 C595.2 C597.2 C598.2 C599.2 C600.2 D1.1 D7.3 D7.8 D10.3 D10.8 D26.1 D27.1 D31.1 D32.1 D33.1 D34.1 D35.3 D35.8 D36.3 D36.8 D37.3 D37.8 D38.3 D38.8 D39.C(CATHODE) D41.C(CATHODE) D42.C(CATHODE) D43.C(CATHODE) D44.1 D45.1 D46.1 D47.1 D48.1 FL4.2 FL5.2 FL6.2 FL7.2 FL8.2 FL9.2 FL10.2 FL11.2 J1.1 J1.2 J1.8 J1.11 J1.14 J1.20 J1.21 J1.25 J1.26 J1.28 J1.29 J1.30 J1.39 J1.40 J1.41 J1.42 J1.43 J1.44 J1.49 J1.50 J1.SH1 J1.SH2 J1.SH3 J1.SH4 J2.1 J2.2 J2.11 J2.12 J2.17 J2.18 J2.23 J2.24 J2.30 J2.33 J2.34 J2.40 J2.43 J2.49 J2.50 J2.SH1 J2.SH2 J2.SH3 J2.SH4 J4.4 J4.SH1 J4.SH2 J8.4 J8.SH1 J8.SH2 J9.4 J9.SH1 J9.SH2 J10.A1 J10.A12 J10.B1 J10.B12 J10.SH1 J10.SH2 J10.SH3 J10.SH4 J12.10 J12.S1 J12.S2 J13.4 J13.SH1 J13.SH2 J14.6 J14.SH1 J14.SH2 J22.10 J22.S1 J22.S2 J25.2 Q1.2(SOURCE) Q3.2(SOURCE) Q4.2(SOURCE) R14.2 R21.2 R22.2 R34.2 R41.2 R43.2 R45.2 R55.2 R56.2 R94.2 R114.2 R325.2 R326.2 R327.2 R328.2 R329.1 R334.1 R342.2 R1253.2 R1259.2 R1260.2 R1264.2 U1.1 U3.2 U3.15 U6.3(COM_CATHODE) U11.B3 U11.C3 U11.D3 U12.2 U12.15 U13.3(COM_CATHODE) U14.2 U14.15 U15.3(COM_CATHODE) U17.4 U17.6 U17.7 U20.B1(GND) U21.9(VSS) U21.25 U22.6 U23.1 U23.3 U23.5 U24.2 U24.25 U31.B1 U31.C1 U31.C7 U31.D7 U31.F3 U31.G5 U32.C1 U33.3 U34.3 Y1.2 Y1.4
VBUS: L53.2 R116.1 R117.1
VBUS_CONN: D1.2(C2) J10.A4 J10.A9 J10.B4(VBUS4) J10.B9 L53.1
VBUS_DETECT: R114.1 R116.2 U24.8
VDD_1V8: C536.1 C597.1 C598.1 C599.1 C600.1 J1.27 L54.1 R113.1 R323.1 R331.1 R1238.1 R1239.1 R1242.1 R1243.1 R1258.1 U1.2 U22.1 U33.5(VDD) U34.5(VDD)
VDD_AUD_5V0: C153.1 C154.1 L7.1 U32.A1 U32.B1(VOUT2)
VDD_CAN1_3V3: C2.1 L2.2 U3.5
VDD_CAN1_5V0: C1.1 C4.1 L1.2 R1.1 U3.3 U3.10
VDD_CAN2_3V3: C7.1 L4.2 U12.5
VDD_CAN2_5V0: C6.1 C9.1 L3.2 R6.1 U12.3 U12.10
VDD_CAN3_3V3: C12.1 L6.2 U14.5
VDD_CAN3_5V0: C11.1 C14.1 L5.2 R10.1 U14.3 U14.10
VDD_CAN_5V0: C523.1 C524.1 FL9.1 FL10.1 FL11.1 U11.C2 U11.D1 U11.D2
VDD_CON_GPS_3V3: D37.4 D37.7 FL6.3(OUTPUT) J22.8
VDD_CON_GPS_5V0: D26.2(C2) FL5.3(OUTPUT) J22.1
VDD_CON_I2C_5V0: D44.2(C2) FL8.3(OUTPUT) J13.1
VDD_CON_PWM: D31.2(C2) FL4.3(OUTPUT) J12.1
VDD_CON_UART_5V0: D27.2(C2) FL7.3(OUTPUT) J14.1
VDD_SYS_3V3: C18.1 C19.1 C514.1 C515.1 C528.1 C532.1 C534.1 C535.1 C601.1 FL6.1 J1.31 J1.32 J1.33 J1.34 J1.35 J1.36 J1.37 J1.38 L2.1 L4.1 L6.1 L55.1 R35.1 R36.1 R46.1 R47.1 R111.1 R112.1 R118.1 R119.1 R1237.1 R1240.1 R1241.1 SW3.1 SW3.2 U17.3 U17.11(VDDIO) U21.21 U21.23 U22.11
VDD_SYS_5V0: C16.1 C152.1 C526.1 C527.1 C531.1 C533.1 FL5.1 FL7.1 FL8.1 J1.45 J1.46 J1.47 J1.48 L1.1 L3.1 L5.1 R50.1 U11.A1 U11.A2(VIN2) U32.A2 U32.B2
VDD_USB_3V3: C544.1 C546.1 R30.1 R31.1 R32.1 R33.1 R65.1 R115.1 R119.2 U24.5(VIO) U24.6
ADC_IN6: C537.1 J2.26 R56.1 R57.2
ADC_IN7: C538.1 J2.28 R91.2 R94.1
ARM_IO: D37.1 D37.10 J2.21 J22.6
AUD_ADCDAT: R339.2 U31.D2
AUD_BCLK: R336.2 U31.E1
AUD_DACDAT: R338.2 U31.D1
AUD_INT_3V3_N: U21.7 U22.10
AUD_INT_N: R331.2 R335.2 U22.2
AUD_LRCLK: R337.2 U31.D3
AUD_PWREN: R344.1 U21.16
AUD_SCL: R332.2 R1234.2 U31.F1
AUD_SDA: R333.2 R1235.2 U31.E2
BUZZER: D37.5 D37.6(NC4) J22.9 R40.2
CAN1_EN: R54.1 U3.6 U21.1
CAN1_ERR_N: U3.8 U21.10
CAN1_H: J4.2 R3.1 U3.13 U6.1
CAN1_L: J4.3 R4.1 U3.12 U6.2
CAN1_RX: J1.24 U3.4
CAN1_STB_N: U3.14 U21.2
CAN1_TX: J1.22 U3.1
CAN2_EN: R52.1 U12.6 U21.3
CAN2_ERR_N: U12.8 U21.11
CAN2_H: J8.2 R9.1 U12.13 U13.1
CAN2_L: J8.3 R7.1 U12.12 U13.2
CAN2_STB_N: U12.14 U21.4
CAN3_EN: R53.1 U14.6 U21.5
CAN3_ERR_N: U14.8 U21.12
CAN3_H: J9.2 R13.1 U14.13 U15.1
CAN3_L: J9.3 R11.1 U14.12 U15.2
CAN3_RX: U14.4 U22.7
CAN3_STB_N: U14.14 U21.6
CAN3_TX: U14.1 U22.8(YB3)
CAN_PWR_EN: R14.1 R49.1 U11.B4 U21.8
CCM_CLKO2_FLEXIO1_IO27: J2.32 TP264.1(TP)
CCM_CLKO3_CAN3_TX: J2.36 U22.4
CCM_CLKO4_CAN3_RX: J2.38 U22.5
CON_CAN1_5V0: D34.2(C2) FL11.3(OUTPUT) J4.1
CON_CAN2_5V0: D33.2(C2) FL10.3(OUTPUT) J8.1
CON_CAN3_5V0: D32.2(C2) FL9.3(OUTPUT) J9.1
DEBUG_TCLK_SWCLK: J1.13 TP263.1(TP)
DEBUG_TDI: J1.19 TP260.1(TP)
DEBUG_TDO_TRACESWO: J1.17 TP261.1(TP)
DEBUG_TMS_SWDIO: J1.15 TP262.1(TP)
DMIC_CLK: R1255.2 R1257.2 U31.F4
DMIC_DATA: R1254.2 R1256.2 U31.E3
GPIO12_SPI8_PCS0: J2.35 R1251.1
GPIO13_SPI8_SIN: J2.37 R1246.2
GPIO14_SPI8_SOUT: J2.39 R1250.1
GPIO15_SPI8_SCK: J2.41 R1249.1
GPIO17_IMU_INT1: J2.45 R1247.2
GPIO18_IMU_INT2: J2.47 R1248.2
GPIO25_CAN2_TX: J2.20 U12.1
GPIO26_SPI8_PCS1: J2.10 R1252.1
GPIO27_CAN2_RX: J2.22 U12.4
HP_FB: R329.2 U31.B4
HP_J_D: D47.2(C2) J25.5 R324.2
HP_J_L: C140.1 D46.2(C2) J25.4 L8.2
HP_J_R: C143.1 D48.2(C2) J25.3 L9.2
HP_JD: R323.2 R324.1 U31.G1
HP_L: C139.1 L8.1 R325.1 U31.B5
HP_MICIN: C590.1 D45.2(C2) J25.1 L41.2
HP_MICN: R1244.1 U31.D4
HP_MICP: R1245.1 U31.F6
HP_R: C142.1 L9.1 R328.1 U31.A5
I2C4_SCL: J1.18 R1241.2 U1.6 U21.19
I2C4_SCL_1V8: R1234.1 R1238.2 U1.3
I2C4_SDA: J1.16 R1240.2 U1.5 U21.20
I2C4_SDA_1V8: R1235.1 R1239.2 U1.4
I2C6_SCL: D7.4 D7.7 D38.1 D38.10 J2.9 J13.2 J22.4 R111.2
I2C6_SDA: D7.5 D7.6(NC4) D38.2 D38.9 J2.7 J13.3 J22.5 R112.2
I3C1_SCL: J1.6 TP257.1(TP)
I3C1_SDA: J1.4 TP256.1(TP)
I3C2A_SCL: J1.12 R332.1 R1243.2
I3C2A_SDA: J1.10 R333.1 R1242.2
IMU_INT1: R1247.1 U17.16
IMU_INT2: R1248.1 U17.12
IMU_PCS0: R1251.2 U17.14
IMU_PCS1: R1252.2 U17.5
IMU_SCK: R1249.2 U17.8
IMU_SIN: R1246.1 U17.10 U17.15
IMU_SOUT: R1250.2 U17.9
IO_EXT_RST_N: R36.2 R48.2 U21.24
IO_WAKE_INT: J1.23 R35.2 U21.22
LED_B: R62.1 U21.15
LED_G: R64.1 U21.14
LED_R: R63.1 U21.13
MICBIAS: C150.1 R1233.1 U31.A4
RX1_LED: D2.C(CATHODE) U24.15
RX2_LED: D4.C(CATHODE) U24.24
SAI2_RX_DATA0: J2.42 R339.1
SAI2_TX_BCLK: J2.46 R336.1
SAI2_TX_DATA0: J2.48 R338.1
SAI2_TX_SYNC: J2.44 R337.1
SPK_LN: R343.1 U31.B3
SPK_LP: R341.1 U31.A1
SPK_RN: R345.1 U31.C3
SPK_RP: R346.1 U31.B2
SPKOUTLN: C155.2 C156.2 J24.2 R343.2
SPKOUTLP: C151.1 C155.1 J24.1 R341.2
SPKOUTRN: C157.1 C158.1 J24.3 R345.2
SPKOUTRP: C158.2 C159.2 J24.4 R346.2
SW_LED_OUT: C601.2 D37.2 D37.9 J22.7 R1264.1 SW3.3 SW3.4(B2) U21.17
TPM3_CH0: D35.1 D35.10 J2.13 J12.2
TPM3_CH1: D35.2 D35.9 J2.4 J12.3
TPM3_CH3: D35.4 D35.7 J2.8 J12.4
TPM4_CH0: D35.5 D35.6(NC4) J2.15 J12.5
TPM4_CH1: D36.1 D36.10 J2.6 J12.6
TPM5_CH0: D36.2 D36.9 J2.19 J12.7
TPM5_CH1: D36.4 D36.7 J2.14 J12.8
TPM6_CH1: D36.5 D36.6(NC4) J2.16 J12.9 S1.2
TX1_LED: D3.C(CATHODE) U24.14
TX2_LED: D5.C(CATHODE) U24.23
UART1_RXD: J1.5 R58.2
UART1_TXD/BT_MODE0: J1.3 R59.2 R1260.1
UART2_RXD: J1.9 R60.2
UART2_TXD/BT_MODE1: J1.7 R61.2 R1259.1
UART5_RX: D7.2 D7.9 J2.5 J22.3
UART5_TX: D7.1 D7.10 J2.3 J22.2
UART7_CTS_B: D10.4 D10.7 J2.29 J14.4
UART7_RTS_B: D10.5 D10.6(NC4) J2.31 J14.5
UART7_RX: D10.2 D10.9 J2.27 J14.3
UART7_TX: D10.1 D10.10 J2.25 J14.2
USB_CON_DM: J10.A7 J10.B7 U20.A1
USB_CON_DP: J10.A6 J10.B6 U20.A2
USB_DM: U20.C1 U24.4
USB_DP: U20.C2 U24.3
N20053038: R1.2 U3.9(WAKE)
N20053822: C5.1 R3.2 R4.2 R5.2
N20053962: R5.1 U3.11
N20058723: R6.2 U12.9(WAKE)
N20058772: R8.1 U12.11
N20058873: C10.1 R7.2 R8.2 R9.2
N20059561: R10.2 U14.9(WAKE)
N20059610: R12.1 U14.11
N20059703: C15.1 R11.2 R12.2 R13.2
N20060644: C17.1 U11.D4
N20061004: R43.1 U11.A3
N20088750: D2.A R30.2
N20088753: D3.A R31.2
N20089288: D4.A R32.2
N20089290: D5.A R33.2
N20094822: R34.1 U21.18
N20106794: Q1.1 R41.1 S1.1(NC)
N20106801: Q1.3 R40.1
N20159039: Q3.1 R45.1 R113.2
N20163544: Q4.3 R46.2 R48.1
N20163589: Q3.3 Q4.1 R47.2
N20172629: D39.A R49.2
N20174182: D42.A R53.2
N20174333: D43.A R54.2
N20178595: TP255.1(TP) U22.9
N20182715: R62.2 U23.2
N20182769: R63.2 U23.4
N20182794: R64.2 U23.6
N20208850: R65.2 R91.1
N20311259: R55.1 U22.12
N20341188: D41.A R52.2
N20361899: R115.2 U24.9
N20361925: C545.1 U24.16
N20362111: R58.1 U24.13
N20362592: R59.1 U24.12
N20362890: R61.1 U24.20
N20362893: R60.1 U24.21
N20368885: J10.A5 R21.1
N20368891: J10.B5 R22.1
N20378290: C547.1 R117.2 R118.2 U24.7
N20386284: C132.1 C133.1 C134.1 C135.1 C500.1 L54.2 U31.C6 U31.D6 U31.G2 U31.G3 U31.G4
N20386625: C138.1 C141.1 L7.2 U31.A2 U31.C2
N20386676: C136.1 L55.2 U31.A3
N20387022: C146.1 U31.B6
N20387024: C146.2 U31.B7
N20387049: C147.1 U31.A7
N20387076: C148.1 U31.A6
N20387210: R334.2 U31.F2
N20387346: C591.1 C592.1 R1231.1 R1233.2
N20387441: C149.1 U31.C5
N20387462: C144.2 R1231.2 R1232.1
N20387549: C145.2 L41.1 R1232.2
N20387698: R342.1 R344.2 U32.C2
N20412531: C139.2 R326.1
N20412805: C142.2 R327.1
N20421509: C145.1 C589.2 R1245.2
N20422040: C144.1 C588.1 R1244.2
N20428202: C593.1 U31.G7 Y1.1
N20428207: R1236.1 Y1.3
N20428656: C594.1 R1236.2 U31.F7(XTO)
N20442778: R335.1 U31.E4
N20447268: C595.1 R1237.2 U1.7(VREF2) U1.8
N20452575: TP265.1(TP) U31.C4
N20452580: TP266.1(TP) U31.F5
N20452893: TP267.1(TP) U31.G6
N20463767: TP245.1(TP) U22.3
N20496748: R1254.1 U33.1
N20496751: R1255.1 U33.4
N20496819: R1253.1 U33.2
N20497965: R1256.1 U34.1
N20497980: R1257.1 U34.4
N20498681: R1258.2 U34.2
N20566026: FL4.1 R50.2 R51.2
N20566511: R51.1 R57.1

Pads without a net: D38 4 5 6 7; J10 A2 A3 A8 A10 A11 B2 B3 B8 B10 B11; J25 6; U3 7; U11 A4 B1 B2 C1 C4; U12 7; U14 7; U17 1 2 13; U24 1 10 11 17 18 19 22; U31 D5 E5 E6 E7

## Via types
v1: diameter 0.457, hole 0.206, TOP to BOTTOM, 250 vias
v2: diameter 0.457, hole 0.203, TOP to BOTTOM, 428 vias

## Routing (per net, layer and track width the routed paths; a pad name or vN(x,y) marks a point on that pad's centre or on a via; arc(x,y) is an arc through that point)
GND: length 209.1
  TOP w0.075: 20.47,61.12 19.91,61.35 19.4,61.35 U31.F3 ; 18.15,64.4 18.15,64.03
  TOP w0.1: 17.68,64.03 17.68,64.4
  TOP w0.145: 17.65,64 17.68,64.03
  TOP w0.15: 18.15,64.4 18.15,64.58 18.32,64.75 v2(18.32,64.83) ; 17.68,64.4 17.68,64.7 v2(17.5,64.88) ; U31.C7 17.65,64 ; 18.15,64.03 U31.D7
  TOP w0.2: 30.15,62 U20.B1 ; U1.1 24.07,33.01 ; U32.C1 10.95,58.37
  TOP w0.25: U31.B1 17.15,60.45 v2(17.4,60.2) 17.65,60.45 U31.C1 ; U31.G5 20.07,62.6 v1(20.4,62.92)
  TOP w0.3: v2(5.05,28) D10.8 D10.3 v2(2.9,28) ; U12.15 23.75,40.3 23.5,40.55 U12.2 ; v2(24.5,11.2) D36.3 D36.8 v2(24.5,13.35) ; C141.2 v2(16.9,56.2) C138.2 v2(17.88,56.23) ; v2(30.05,21.75) 30.04,21.76 28.66,21.76 v2(28.65,21.75) ; C10.2 v2(26.75,42.2) ; v2(30.25,19.25) FL6.2 v2(28.45,19.25) ; v1(37.1,22.98) v1(38.1,22.98) ; v2(30.4,17.95) 31.05,17.95 D37.8 31.15,17.95 31.85,17.95 D37.3 31.95,17.95 v2(32.65,17.95) ; v2(13.75,43.05) U21.9 13.75,40.5 U21.25 ; v2(31.4,24.8) FL11.2 v2(31.4,26.5) D34.1 ; 37.35,66.95 v2(37.35,65.95) ; 37.35,66.95 J10.SH4 38.2,66.95 ; 37.35,66.95 v2(37.35,67.9) ; R94.2 10.37,49.59 C538.2 10.35,50.32 v2(10.35,51.1) ; R41.2 v2(23.8,20.2) ; v2(5.38,24.88) J14.6 v2(7.97,24.88) ; v2(31.4,45.8) FL9.2 v2(31.4,47.5) D32.1 ; Q1.2 v2(27.22,17.17) ; v2(29.55,64.65) D1.1 v2(29.55,63.25) ; v2(4.05,19.25) FL8.2 v2(4.05,20.95) ; v2(20.47,61.12) 20.47,61.12 ; 25.46,70.17 C599.2 ; v2(31.4,35.3) FL10.2 v2(31.4,37) D33.1 ; v2(12.65,5.75) D31.1 v2(11.1,5.75) ; v2(5.08,16) D38.3 v2(2.98,16) ; v2(31.45,7.25) FL5.2 v2(31.45,9.1) D26.1 v2(31.45,10.65) ; v1(18.07,67.72) 18.93,66.87 C594.2 ; 30.15,61.8 30.15,62 ; v2(30,41) U13.3 v2(30,39.5) ; v2(32.55,13) D7.3 D7.8 v2(30.45,13) ; v2(7.85,33.9) D27.1 v2(7.85,35.3) FL7.2 v2(7.85,37) ; 13.2,30.49 U17.7 ; 13.2,30.49 13.2,30.09 13.3,29.99 U17.6 ; 13.2,30.49 v2(13.2,31.1) ; 38.2,66.95 v2(38.2,67.9) ; 38.2,66.95 v2(38.2,65.95) ; v2(27.48,63.9) U24.2 25.45,63.9 U24.25 ; C5.2 v2(27.49,32.39) ; v1(14.75,33.34) 15.03,33.62 Q3.2 ; R56.2 v2(19.35,14.55) ; R1260.2 29.31,70.41 v2(29.8,70.9) ; D44.1 v2(4.12,17.94) ; C537.2 v2(19.35,13.6) ; v2(14.5,11.2) D35.3 D35.8 v2(14.5,13.3) ; v2(30,30.5) U6.3 v2(30,29) ; v2(5.42,14.88) J13.4 v2(7.92,14.88) ; U3.15 23.75,29.75 23.45,30.05 U3.2 ; Q4.2 v2(17,34.6) ; v1(12.3,29.27) 12.58,28.99 U17.4 ; v2(10.12,5.78) FL4.2 v2(10.12,7.42) ; C15.2 29.53,51.96 v2(30,51.5) U15.3 30.67,50.08 v2(31.05,50.08) ; R21.2 v2(28.35,60.85) ; 10.95,58.37 v1(11.56,58.98) ; U14.2 23.55,51.05 23.75,50.85 U14.15 ; R34.2 v2(8.5,39) ; 24.07,33.01 v1(24.26,32.83) ; R22.2 v2(28.35,59.9)
  TOP w0.45: v2(25.3,70.9) 25.46,70.17 ; v2(25.12,6.45) J12.10 v2(25.12,3.75)
  TOP w0.5: v2(32.02,41.98) 32.17,42.12 J8.4 v2(35.85,42.12) ; U23.1 v2(3.35,53.85) ; v2(30.15,61.65) 30.15,61.8 ; v2(35.23,21.12) J22.10 v2(32.48,21.12) ; v2(32.77,52.62) J9.4 v2(35.23,52.62) ; v2(35.23,31.62) J4.4 v2(32.77,31.62) ; U23.3 v2(2.5,55.5) ; U23.5 v2(1.65,53.85)
  L2_GND1 w0.305: 32.19,66.23 J10.SH2 ; J10.SH2 32.19,67.67 ; J10.SH2 33.2,66.95 ; J10.SH2 31.18,66.95 ; J10.SH1 33.2,57.95 ; J10.SH1 31.18,57.95 ; J10.SH1 32.19,57.23 ; J10.SH1 32.19,58.67 ; 32.55,59.85 J10.B12 32.55,58.95 ; 32.55,65.95 J10.B1 32.55,65.05 ; 36.68,57.95 J10.SH3 ; J10.SH3 37.8,58.67 ; J10.SH3 37.8,57.23 ; 36.68,66.95 J10.SH4 ; J10.SH4 37.8,67.67 ; J10.SH4 37.8,66.23
  L3_SIG1 w0.305: J10.SH1 33.2,57.95 ; J10.SH1 32.19,57.23 ; J10.SH1 32.19,58.67 ; J10.SH2 32.19,67.67 ; J10.SH2 33.2,66.95 ; J10.SH2 31.18,66.95 ; J10.SH2 32.19,66.23 ; 37.8,57.23 J10.SH3 ; J10.SH3 36.68,57.95 ; J10.SH3 37.8,58.67 ; J10.SH4 37.8,67.67 ; J10.SH4 37.8,66.23 ; J10.SH4 36.68,66.95
  L4_SIG2 w0.305: 37.8,57.23 J10.SH3 ; J10.SH3 36.68,57.95 ; J10.SH3 37.8,58.67 ; 31.18,66.95 J10.SH2 ; J10.SH2 33.2,66.95 ; J10.SH2 32.19,67.67 ; J10.SH2 32.19,66.23 ; J10.SH1 33.2,57.95 ; J10.SH1 32.19,58.67 ; J10.SH1 31.18,57.95 ; J10.SH1 32.19,57.23 ; 32.55,65.95 J10.B1 32.55,65.05 ; 32.55,58.95 J10.B12 32.55,59.85 ; 37.8,66.23 J10.SH4 ; J10.SH4 37.8,67.67 ; J10.SH4 36.68,66.95
  L5_GND2 w0.305: 31.18,66.95 J10.SH2 ; J10.SH2 32.19,67.67 ; J10.SH2 32.19,66.23 ; J10.SH2 33.2,66.95 ; 37.8,66.23 J10.SH4 ; J10.SH4 36.68,66.95 ; J10.SH4 37.8,67.67 ; 32.55,59.85 J10.B12 32.55,58.95 ; J10.SH1 33.2,57.95 ; J10.SH1 32.19,58.67 ; J10.SH1 32.19,57.23 ; J10.SH1 31.18,57.95 ; 37.8,57.23 J10.SH3 ; J10.SH3 37.8,58.67 ; J10.SH3 36.68,57.95 ; 32.55,65.05 J10.B1 32.55,65.95
  BOTTOM w0.2: J1.8 v2(28.1,73.6) ; v2(26.98,73.6) 26.9,73.53 J1.14 ; J1.21 v2(25.3,70.9) ; J2.23 v2(10.35,53.75) ; J1.11 v2(27.3,69.3) ; J2.34 v2(12.35,51.1) ; J2.17 v2(9.15,53.65) ; J2.12 v2(7.95,52.85) ; J2.30 v2(11.55,51.1) ; J2.33 v2(12.35,55.35) ; v2(13.1,52.65) 13.2,52.65 13.55,52.3 J2.40 ; J2.11 v2(7.95,53.65) ; J2.SH3 v2(16.02,53.9) ; J2.18 v2(9.15,52.85) ; J1.20 v2(25.7,73.6) ; J2.43 v2(14.35,55.35) ; J2.24 v2(10.35,51.1) ; J2.49 v2(15.55,55.35)
  BOTTOM w0.3: v2(17.4,60.2) 17.66,60.19 18.25,60.74 C136.2 ; 37.35,66.95 J10.SH4 38.2,66.95 ; 37.35,66.95 v2(37.35,67.9) ; 37.35,66.95 v2(37.35,65.95) ; v2(38.25,59) 38.25,58.25 37.95,57.95 J10.SH3 37.65,57.95 37.4,58.2 v2(37.4,59) ; U33.3 v2(12.88,8.09) ; D47.1 24.35,45.75 v2(24.5,45.9) ; R1253.2 13.78,10.47 v2(14.5,11.2) ; v2(31.75,67.95) 31.75,67.2 32,66.95 J10.SH2 32.4,66.95 32.55,67.1 v2(32.55,67.95) ; C546.2 v1(25.45,65.38) 25.84,65.28 ; 38.2,66.95 v2(38.2,67.9) ; 38.2,66.95 v2(38.2,65.95) ; v2(31.8,57.05) 31.8,57.85 31.9,57.95 J10.SH1 32.45,57.95 32.6,57.8 v2(32.6,57.05) ; v1(37.5,49.5) 37.5,50.3 R329.1 ; 29.28,62.6 29.28,62.98 v2(29.55,63.25) ; C536.2 v2(13.05,46.75) ; R43.2 v2(27.35,58.75) ; U22.6 v2(14.75,51.2) ; R14.2 v2(28.25,57.65) ; D45.1 37.98,40.02 v2(38,40) ; U34.3 v2(28.75,8.09) ; C17.2 v2(28.25,56.65)
  vias: v1(1.89,59.34) v1(3.37,62.2) v1(3.37,60.44) v1(4.31,63.62) v1(5.75,72.21) v1(5.75,69.17) v1(5.72,68.28) v1(5.73,65.24) v1(8.43,60.45) v1(9.04,58.41) v1(9.03,32.98) v1(9.03,23.02) v1(9.03,20.48) v1(9.03,13.03) v1(9.89,64.86) v1(9.97,61.64) v1(10.03,32.98) v1(10.03,23.02) v1(10.03,20.48) v1(10.03,13.03) v1(10.29,60.76) v1(10.77,65.91) v1(11.03,32.98) v1(11.03,23.02) v1(11.03,20.48) v1(11.03,13.03) v1(11.33,11.45) v1(11.64,65.81) v1(12.03,2.9) v1(12.03,1.9) v1(12.03,0.9) v1(12.16,58.21) v1(12.75,41) v1(12.75,39.5) v1(12.75,35.49) v1(13.3,58.69) v1(13.39,62.42) v1(13.46,60.47) v1(14.18,65.15) v1(14.18,64.15) v1(14.25,41) v1(14.25,39.5) v1(14.75,46.74) v1(14.75,35.49) v1(15.62,57.05) v1(15.75,46.74) v1(15.88,69.33) v1(17.46,28.65) v1(19.3,70.9) v1(19.6,51.2) v1(19.6,40.7) v1(19.6,30.2) v1(19.68,67.64) v1(20.55,51.2) v1(20.55,48.09) v1(20.55,40.7) v1(20.55,37.59) v1(20.55,30.2) v1(20.55,27.09) v1(20.98,56.82) v1(21.3,72.1) v1(21.3,70.9) v1(21.3,69.4) v1(22.05,17.49) v1(22.34,68.58) v1(23.25,51.5) v1(23.25,50.5) v1(23.25,49) v1(23.25,48) v1(23.25,41) v1(23.25,40) v1(23.25,38.5) v1(23.25,37.5) v1(23.25,30.5) v1(23.25,29.5) v1(23.25,28) v1(23.25,27) v1(23.34,60.45) v1(23.41,61.91) v1(23.95,65.38) v1(23.95,63.88) v1(24.1,73.6) v1(24.1,72.1) v1(24.25,51.5) v1(24.25,50.5) v1(24.25,49) v1(24.25,48) v1(24.25,41) v1(24.25,40) v1(24.25,38.5) v1(24.25,37.5) v1(24.25,30.5) v1(24.25,29.5) v1(24.25,28) v1(24.25,27) v1(25.45,63.88) v1(26.98,2.9) v1(26.98,1.9) v1(26.98,0.9) v1(27.2,11.45) v1(27.83,66.64) v1(29.55,47.16) v1(29.68,42.87) v1(30.48,66.62) v1(34.91,56.25) v1(34.91,45.5) v1(34.91,35) v1(34.91,24.5) v1(36.1,22.98) v1(36.1,8.03) v1(36.2,54.48) v1(36.25,47) v1(36.2,43.98) v1(36.2,36.52) v1(36.2,33.48) v1(36.2,26.02) v1(37.1,8.03) v1(37.2,54.48) v1(37.25,47) v1(37.2,43.98) v1(37.2,36.52) v1(37.2,33.48) v1(37.2,26.02) v1(38.1,8.03) v1(38.2,54.48) v1(38.25,47) v1(38.2,43.98) v1(38.2,36.52) v1(38.2,33.48) v1(38.2,26.02) v2(1,29.5) v2(1,27.5) v2(1,25.5) v2(1,23.5) v2(1,21.5) v2(1,19.5) v2(1,17.5) v2(1,15.5) v2(1,13.5) v2(1,11.5) v2(1.3,47.7) v2(2,30.5) v2(2.3,47.1) v2(3.75,30.5) v2(5.15,53.8) v2(5.15,52.7) v2(5.55,48.3) v2(6,52.7) v2(6.8,38.75) v2(6.8,37.9) v2(8.5,18.25) v2(8.5,1) v2(8.95,16.7) v2(10.5,1) v2(11.45,9.7) v2(12.5,19.5) v2(13.5,18.5) v2(14.05,26.05) v2(14.5,1) v2(15,19.5) v2(14.97,9.25) v2(15.97,42.67) v2(16.5,1) v2(16.7,52) v2(16.7,51.2) v2(16.95,9.75) v2(17,18.5) v2(17.8,32.25) v2(18,18.5) v2(18.07,65.6) v2(18.45,24.1) v2(18.5,75) v2(18.5,1) v2(18.55,28.05) v2(18.55,26.65) v2(19.3,73.6) v2(19.3,72.05) v2(19.3,69.4) v2(20.5,75) v2(20.5,19.5) v2(20.5,1) v2(21.15,41.85) v2(21.3,73.6) v2(22.05,9.7) v2(22.32,46.1) v2(22.5,75) v2(22.5,1) v2(22.77,42.85) v2(22.75,19.75) v2(22.9,16.4) v2(23.9,43.88) v2(24,75) v2(24.1,70.9) v2(24.2,16.4) v2(24.18,9.22) v2(24.5,1) v2(25.15,61.6) v2(25.15,60.75) v2(25.25,19.5) v2(25.9,54.55) v2(25.9,53.7) v2(26,61.6) v2(26,60.75) v2(26.75,54.55) v2(26.75,53.7) v2(27.32,9.7) v2(27.7,50.75) v2(27.7,29.75) v2(28.23,13.7) v2(28.5,1) v2(29,75) v2(29.8,73.6) v2(29.8,72.1) v2(29.8,69.45) v2(31,75) v2(31,73.5) v2(31,72) v2(31,70.5) v2(31.18,68.72) v2(31.45,65.85) v2(31.48,15.22) v2(31.55,59) v2(32.25,65.85) v2(32.35,59) v2(38,64.5) v2(38,62.5) v2(38,60.5) v2(38,53) v2(38,50.5) v2(38,38) v2(38,31.5) v2(38,29.5) v2(38,27.5) v2(38,21.5) v2(38,19.5) v2(38,17.5) v2(38,15.5) v2(38,13.5) v2(38,11.5) v2(38,9.5) v2(38.23,48.48) v2(38.23,42.45)
